# Altium PCB 51版_2020-06-08_13-23-04.pcbdoc
Units mil, origin at the board's own origin, x right, y up, seen from the top; angles counter-clockwise.
Board outline 2349.92 x 2340 mil, 2 copper layers (Top Layer, Bottom Layer); 17 components, 44 nets, 98 pads, 27 vias.
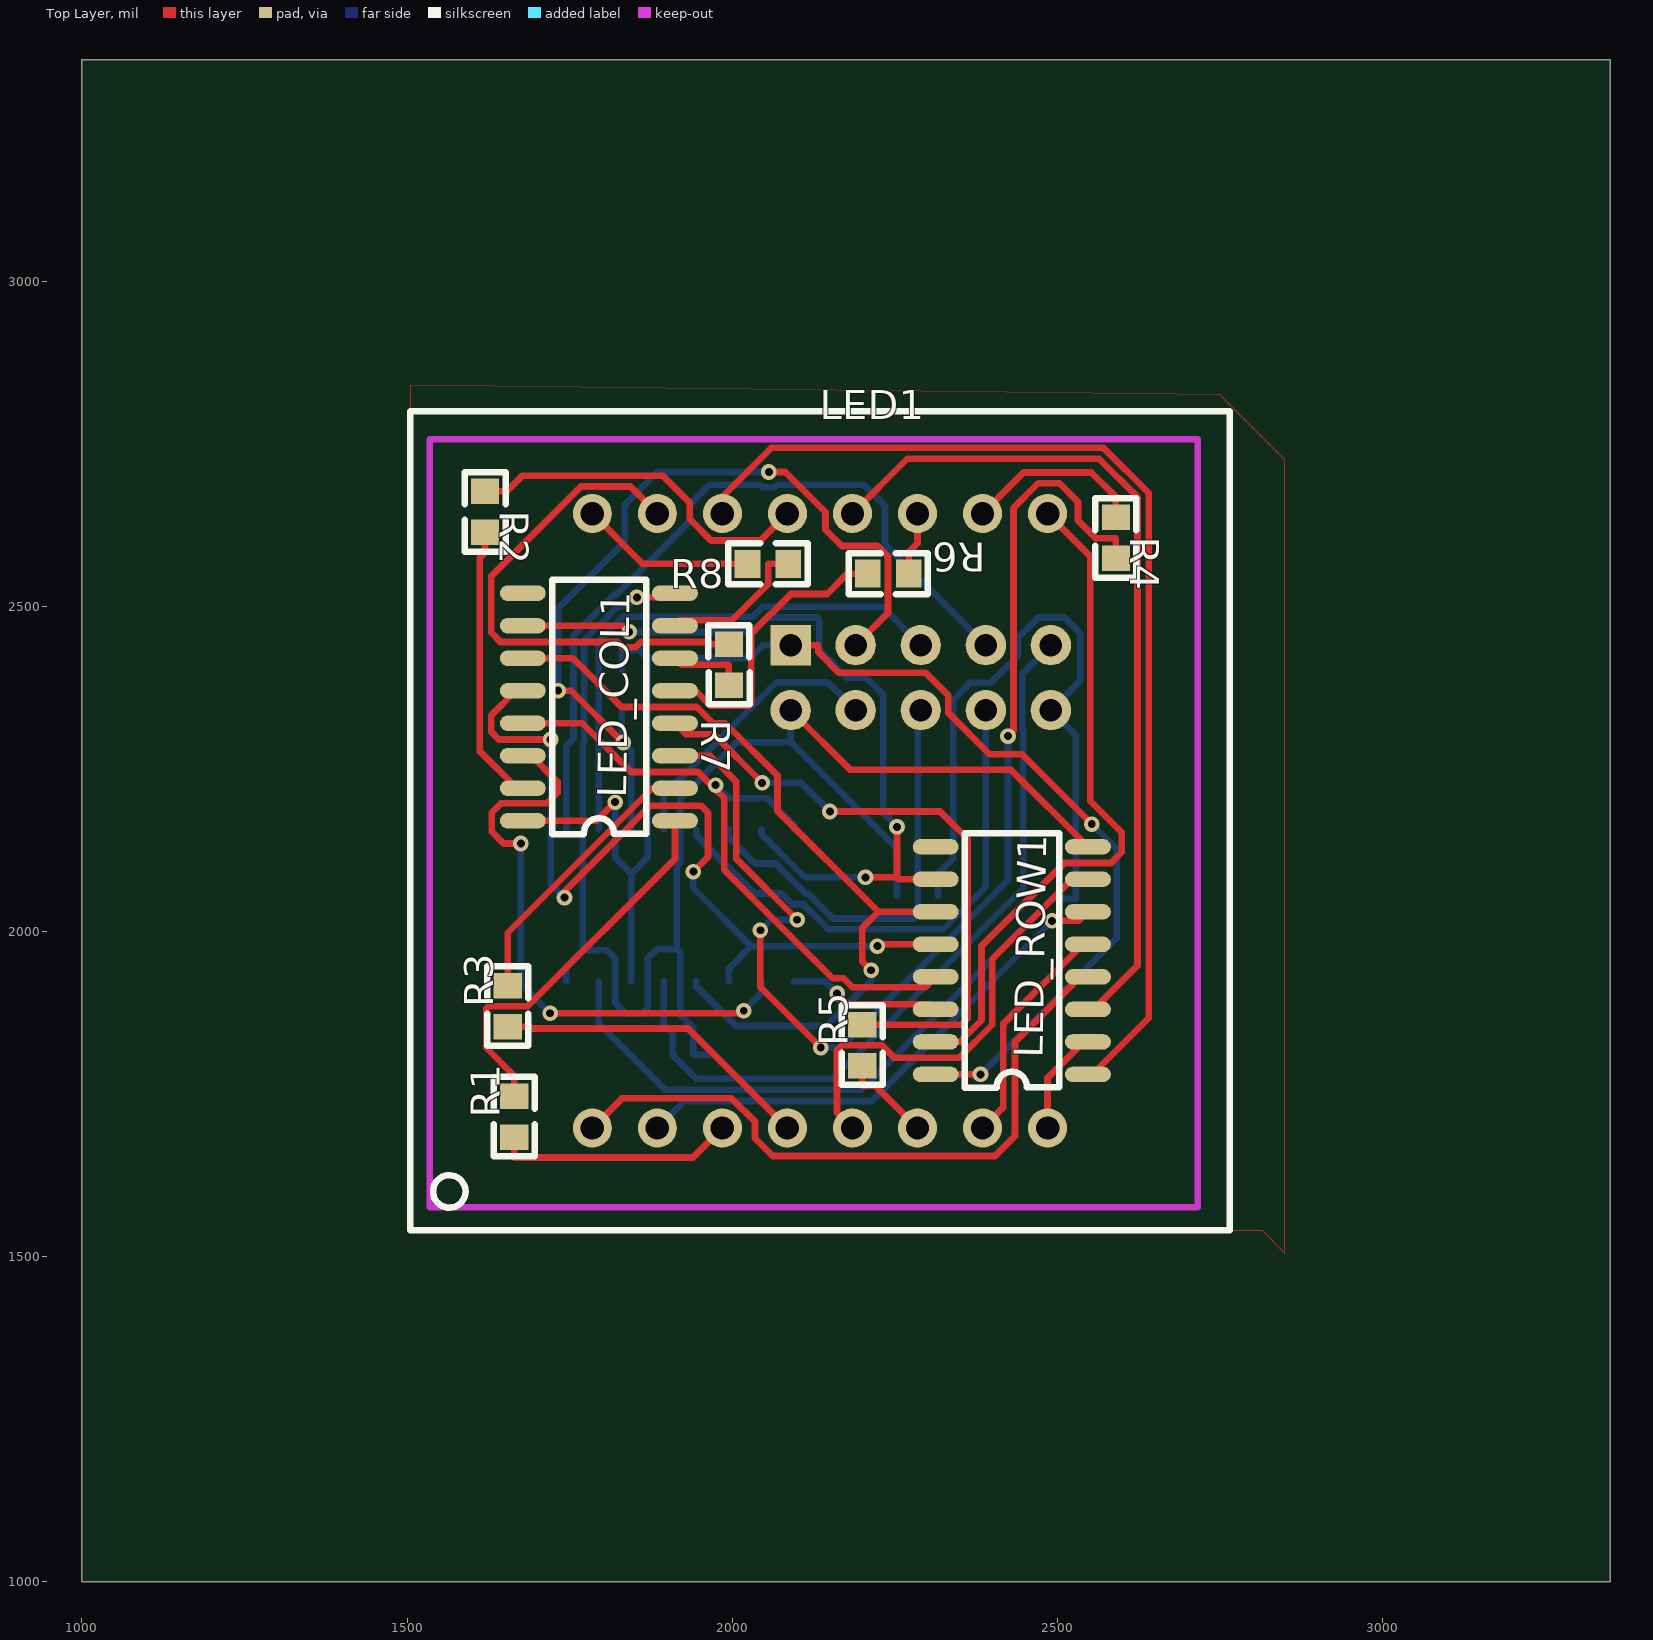
[diagram p0: Top Layer view]
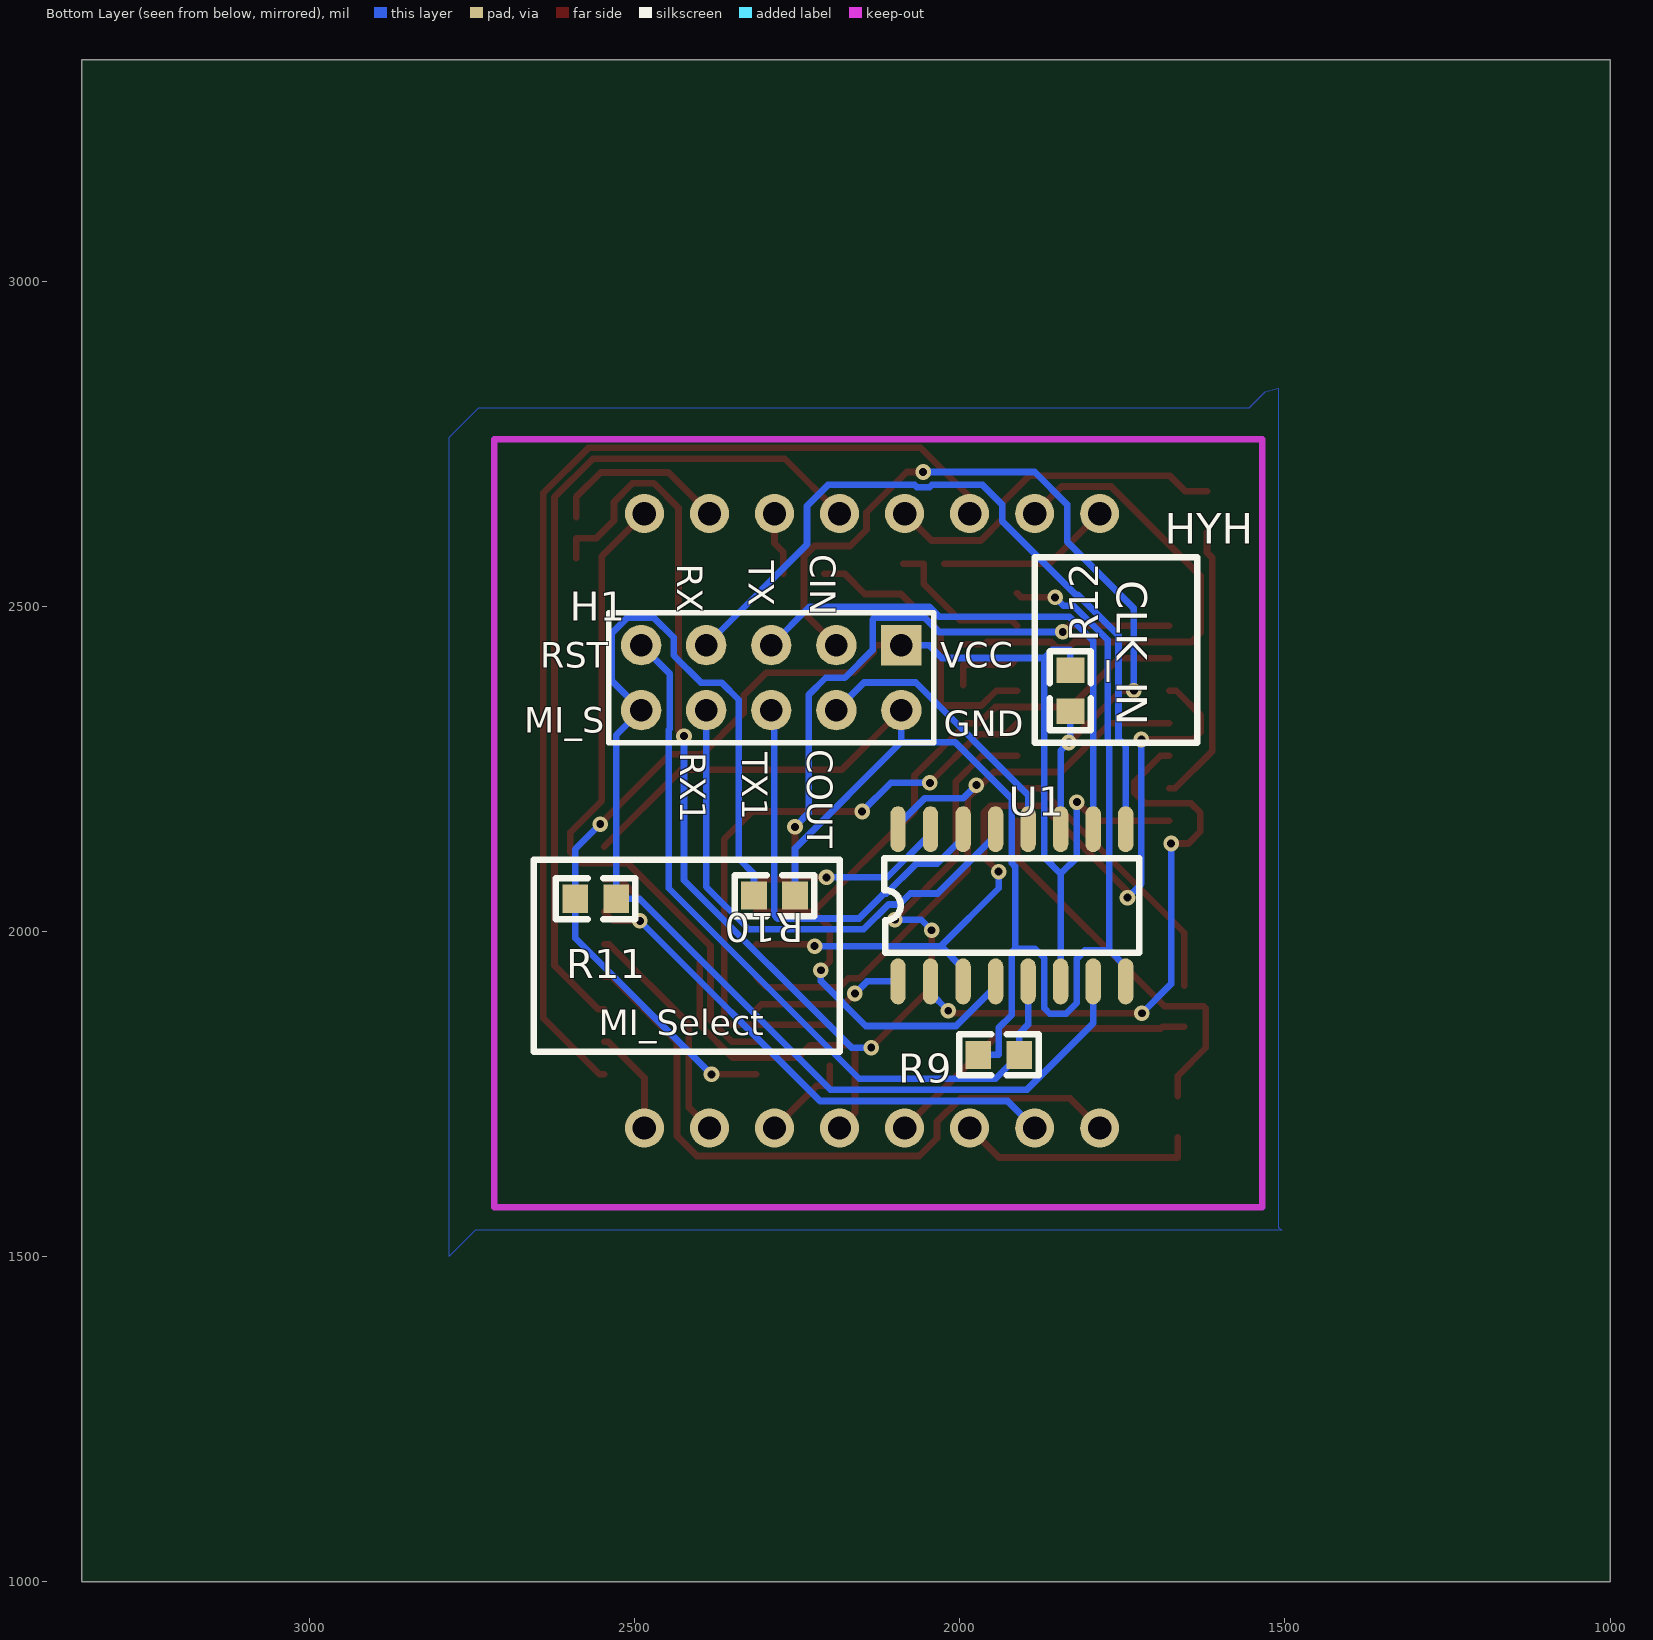
[diagram p1: Bottom Layer view, seen from below]

## Layer stack, top to bottom
Top Layer: signal copper (thickness not stored)
Dielectric: dielectric 12.6, FR-4, Dk 4.8
Bottom Layer: signal copper (thickness not stored)

## Board outline
3349.92,1000 1000,1000 1000,3340 3349.92,3340

## Components (designator, comment, footprint, x,y, rotation, side; value= is the part's Value field where it differs from the comment)
H1 "Female header2.54mm2*5p Straight" HDR-TH_10P-P2.54-V-R2-C5-S2.54 2289.92,2390 r180 bottom
LED1 "SLD1388DRA1GD" SLD1388DRA1GD 2134.92,2170 r0 top
LED_COL1 "74HC595D_C431479" SOIC-16_L9.9-W3.9-P1.27-LS6.0-BL#1 1794.92,2345 r90 top
LED_ROW1 "74HC595D_C431479" SOIC-16_L9.9-W3.9-P1.27-LS6.0-BL#1 2429.92,1955 r90 top
R1 "1K" R0603#1 1664.92,1715 r90 top
R2 "1K" R0603#1 1619.92,2645 r270 top
R3 "1K" R0603#1 1654.92,1885 r90 top
R4 "1K" R0603#1 2589.92,2605 r270 top
R5 "1K" R0603#1 2199.92,1825 r90 top
R6 "1K" R0603#1 2239.92,2550 r180 top
R7 "1K" R0603#1 1994.92,2410 r270 top
R8 "1K" R0603#1 2054.92,2565 r0 top
R9 "1K" R0603#2 1939.92,1810 r0 bottom
R10 "1K" R0603#2 2284.92,2055 r180 bottom
R11 "1K" R0603#2 2559.92,2050 r0 bottom
R12 "1K" R0603#2 1829.92,2370 r270 bottom
U1 "STC15W204S" SOIC-16_L9.9-W3.9-P1.27-LS6.0-BL#2 1919.92,2040 r0 bottom

## Footprints (in the part's own frame and the unit in brackets; to place one, negate y for a bottom-side part, rotate by r counter-clockwise, add the part's x,y. Pads: shape width x height; smd on the part's side, far side on the other; paste and mask are expansions set on the pad)
HDR-TH_10P-P2.54-V-R2-C5-S2.54 [mil]
  rect 62x62 hole 35: 1(200,50)
  round 62 hole 35: 2(200,-50) 3(100,50) 4(100,-50) 5(0,50) 6(0,-50) 7(-100,50) 8(-100,-50) 9(-200,50) 10(-200,-50)
  silkscreen extent -250,-100 250,100
R0603#1 [mm]
  rect 1x1.1 smd: 1(-0.8,0) 2(0.8,0)
  silkscreen extent -1.55,-0.8 1.55,0.81
R0603#2 [mm]
  rect 1x1.1 smd: 1(0.8,0) 2(-0.8,0)
  silkscreen extent -1.55,-0.81 1.55,0.8
SLD1388DRA1GD [mil]
  round 60 hole 36: 1(-350,-472.44) 2(-250,-472.44) 3(-150,-472.44) 4(-50,-472.44) 5(50,-472.44) 6(150,-472.44) 7(250,-472.44) 8(350,-472.44) 9(350,472.44) 10(250,472.44) 11(150,472.44) 12(50,472.44) 13(-50,472.44) 14(-150,472.44) 15(-250,472.44) 16(-350,472.44)
  silkscreen extent -630,-630 630,630
SOIC-16_L9.9-W3.9-P1.27-LS6.0-BL#1 [mil]
  oval 23.62x70.79 smd: 1(-175,-117) 2(-125,-117) 3(-75,-117) 4(-25,-117) 5(25,-117) 6(75,-117) 7(125,-117) 8(175,-117) 9(175,117) 10(125,117) 11(75,117) 12(25,117) 13(-25,117) 14(-75,117) 15(-125,117) 16(-175,117)
  silkscreen extent -196,-73 196,72
SOIC-16_L9.9-W3.9-P1.27-LS6.0-BL#2 [mil]
  oval 23.62x70.79 smd: 1(175,117) 2(125,117) 3(75,117) 4(25,117) 5(-25,117) 6(-75,117) 7(-125,117) 8(-175,117) 9(-175,-117) 10(-125,-117) 11(-75,-117) 12(-25,-117) 13(25,-117) 14(75,-117) 15(125,-117) 16(175,-117)
  silkscreen extent -196,-72 196,73

## Via types
v1: diameter 24.02, hole 12.2, Top Layer to Bottom Layer, 27 vias

## Nets (pads, with @x,y where several pads share a name; then routed paths per layer and width w, separated by ;. In a path a pad name is that pad's centre, name@x,y a point inside that pad or via, vN(x,y) a via of type N, cw(c..) or ccw(c..) an arc to the next point about the centre after c; other vN are vias at no path point)
CLK_IN: H1.3 R12.1 U1.11 | length 1301.5
  Top Layer w10.24: v1(1732.32,2370) 1752.52,2370 v1(1832.22,2290.4) ; v1(2056.32,2706.3) 2081.62,2706.3 2143.42,2644.5 2143.42,2617.6 2168.42,2592.6 2223.42,2592.6 2239.62,2576.4 2239.62,2489.7 H1.3
  Bottom Layer w10.24: v1(1732.32,2370) 1732.32,2496.6 1834.92,2599.2 1834.92,2656.6 1884.72,2706.3 v1(2056.32,2706.3) ; R12.1 1829.92,2307.3 1829.92,2292.6 v1(1832.22,2290.4) 1844.92,2277.6 U1.11
CLK_OUT: H1.4 U1.12 | length 437.2
  Bottom Layer w10.24: U1.12 1894.92,2209.9 2067.62,2382.7 2147.22,2382.7 H1.4
COL_IN: LED_COL1.14 U1.2 | length 917.8
  Top Layer w10.24: v1(1674.92,2135) 1648.42,2135 1630.12,2153.3 1630.12,2182.6 1644.22,2196.7 1714.92,2196.7 1731.42,2213.2 1731.42,2229.8 1691.22,2270 LED_COL1.14 ; v1(1719.92,1874) 2013.82,1874 v1(2017.72,1877.9)
  Bottom Layer w10.24: v1(1674.92,2135) 1674.92,1919.1 v1(1719.92,1874) ; v1(2017.72,1877.9) 2044.92,1905.1 U1.2
COL_OUT: LED_COL1.9
G#(OE): LED_COL1.13 LED_ROW1.13 U1.16 | length 1031.5
  Top Layer w10.24: LED_COL1.13 1769.32,2320 1844.32,2245 1947.52,2245 v1@1971.12,2221.4 ; v1(1974.52,2224.8) v1@1971.12,2221.4 ; LED_ROW1.13 2297.02,1914.1 2184.92,1914.1 2171.12,1927.9 2154.42,1927.9 1987.82,2094.5 1987.82,2204.8 v1@1971.12,2221.4
  Bottom Layer w10.24: v1(1974.52,2224.8) 1994.42,2204.9 2053.62,2204.9 2094.92,2163.6 U1.16
GND: H1.2 LED_COL1.8 LED_ROW1.8 R9.1 R10.1 U1.8 | length 2557.6
  Top Layer w10.24: v1(1853.42,2513.6) 1905.52,2513.6 LED_COL1.8 ; H1.2 2181.62,2248.3 2428.62,2248.3 LED_ROW1.8
  Bottom Layer w10.24: U1.8 1744.92,1945.9 1769.92,1970.9 ; v1(1853.42,2513.6) 1840.42,2500.6 1825.02,2500.6 1772.42,2448 1772.42,2289.3 1769.92,2286.7 1769.92,1970.9 ; R9.1 1940.22,1810 1940.22,1851.3 1919.92,1871.7 1919.92,1968 1914.92,1972.9 ; H1.2 2089.92,2291 ; R10.1 2253.42,2127.5 2089.92,2291 ; 1769.92,1970.9 1807.42,1970.9 1819.92,1958.4 1819.92,1890.1 1836.72,1873.3 1861.62,1873.3 1869.92,1881.7 1869.92,1958.6 1884.22,1972.9 1914.92,1972.9 ; 1914.92,1972.9 1914.92,2099.7 1919.92,2104.7 1919.92,2203.4 2007.42,2291 2089.92,2291
LED_COL0: LED_COL1.15 R2.2 | length 429.7
  Top Layer w10.24: R2.2 1619.92,2582.3 1611.62,2574 1611.62,2277.2 1668.82,2220 LED_COL1.15
LED_COL1: LED_COL1.1 R1.2 | length 597.2
  Top Layer w10.24: R1.2 1664.92,1777.7 1621.72,1820.9 1621.72,1881.7 1624.72,1884.7 1685.42,1884.7 1911.92,2111.2 LED_COL1.1
LED_COL2: LED_COL1.2 R3.2 | length 430.3
  Top Layer w10.24: R3.2 1654.92,1997.8 1877.12,2220 LED_COL1.2
LED_COL3: LED_COL1.3 R4.2 | length 1871
  Top Layer w10.24: LED_COL1.3 1966.22,2270 2006.32,2229.8 2006.32,2111.3 v1(2099.92,2017.8) ; v1(2043.22,2001.7) 2043.22,1914 v1(2136.12,1821.1) ; v1(2424.02,2300.1) 2432.42,2308.5 2432.42,2651 2470.42,2689 2503.22,2689 2531.82,2660.3 2531.82,2631.6 2558.72,2604.7 2589.92,2604.7 R4.2
  Bottom Layer w10.24: v1(2043.22,2001.7) 2059.32,2017.8 v1(2099.92,2017.8) ; v1(2136.12,1821.1) 2166.52,1821.1 2424.02,2078.6 v1(2424.02,2300.1)
LED_COL4: LED_COL1.4 R5.2 | length 966.1
  Top Layer w10.24: LED_COL1.4 1928.62,2303.3 1971.22,2303.3 v1(2046.12,2228.4) ; v1(2150.12,2184.2) 2319.72,2184.2 2362.12,2141.8 2362.12,1865.7 2352.92,1856.5 R5.2
  Bottom Layer w10.24: v1(2046.12,2228.4) 2105.92,2228.4 v1(2150.12,2184.2)
LED_COL5: LED_COL1.5 R6.2 | length 452.8
  Top Layer w10.24: LED_COL1.5 1944.02,2370 1966.72,2347.3 2026.02,2347.3 2029.02,2350.3 2029.02,2457.8 2090.12,2518.8 2146.02,2518.8 2177.22,2550 R6.2
LED_COL6: LED_COL1.6 R7.2 | length 118.5
  Top Layer w10.24: LED_COL1.6 1922.22,2409.7 1994.92,2409.7 R7.2
LED_COL7: LED_COL1.7 R8.2 | length 232.1
  Top Layer w10.24: LED_COL1.7 1920.22,2478.3 1999.72,2478.3 2055.22,2533.8 2055.22,2565 R8.2
LED_ROW0: LED1.9 LED_ROW1.15 | length 1041.9
  Top Layer w10.24: LED_ROW1.15 2349.92,1830 2383.22,1863.2 2383.22,1977.4 2510.82,2105 2582.52,2105 2599.02,2121.5 2599.02,2152 2550.42,2200.7 2550.42,2577 LED1.9
LED_ROW1: LED1.14 LED_ROW1.1 | length 1677.8
  Top Layer w10.24: LED1.14 1984.92,2668.2 2060.12,2743.4 2570.92,2743.4 2640.42,2674 2640.42,1866.8 2553.52,1780 LED_ROW1.1
LED_ROW2: LED1.8 LED_ROW1.2 | length 161.9
  Top Layer w10.24: LED1.8 2484.92,1774.6 2540.32,1830 LED_ROW1.2
LED_ROW3: LED1.12 LED_ROW1.3 | length 1322
  Top Layer w10.24: LED1.12 2269.22,2726.7 2564.02,2726.7 2623.12,2667.7 2623.12,1947.3 2555.72,1880 LED_ROW1.3
LED_ROW4: LED1.1 LED_ROW1.4 | length 1031.6
  Top Layer w10.24: LED1.1 1830.42,1743.1 1999.12,1743.1 2034.92,1707.3 2034.92,1681.7 2062.22,1654.4 2404.22,1654.4 2434.92,1685.1 2434.92,1829.9 2535.02,1930 LED_ROW1.4
LED_ROW5: LED1.7 LED_ROW1.5 | length 354.2
  Top Layer w10.24: LED1.7 2416.52,1729.1 2416.52,1857.5 2538.92,1980 LED_ROW1.5
LED_ROW6: LED1.2 LED_ROW1.6 | length 799.7
  Top Layer w10.24: v1(2492.02,2016.2) 2533.12,2016.2 LED_ROW1.6
  Bottom Layer w10.24: LED1.2 1926.42,1739.1 2214.82,1739.1 v1(2492.02,2016.2)
LED_ROW7: LED1.5 LED_ROW1.7 | length 699
  Top Layer w10.24: LED1.5 2161.12,1721.4 2161.12,1816.7 2169.02,1824.7 2230.12,1824.7 2249.42,1805.4 2348.92,1805.4 2399.82,1856.3 2399.82,1957.3 2522.52,2080 LED_ROW1.7
MI_SELECT: H1.10 R10.2 R11.2 U1.7 | length 1989.3
  Bottom Layer w10.24: U1.7 1794.92,1858.4 1896.72,1756.6 2199.12,1756.6 2492.52,2050 2497.22,2050 R11.2 2528.42,2301.5 H1.10 2534.92,2384.9 2534.92,2458.6 2510.72,2482.7 2470.82,2482.7 2439.92,2451.8 2439.92,2424.4 2398.02,2382.5 2366.32,2382.5 2339.92,2356.2 2339.92,2111.7 2316.42,2088.2 R10.2
R1_1: LED1.3 R1.1 | length 370
  Top Layer w10.24: R1.1 1664.92,1652.3 1939.72,1652.3 LED1.3
R2_1: LED1.13 R2.1 | length 548.3
  Top Layer w10.24: R2.1 1653.12,2676.5 1677.32,2700.7 1893.02,2700.7 1934.92,2658.8 1934.92,2633.6 1967.62,2600.9 2043.42,2600.9 LED1.13
R3_1: LED1.4 R3.1 | length 494.6
  Top Layer w10.24: R3.1 1688.12,1853.5 1691.12,1850.5 1932.02,1850.5 LED1.4
R4_1: LED1.10 R4.1 | length 278.1
  Top Layer w10.24: LED1.10 2448.12,2705.6 2552.02,2705.6 2589.92,2667.7 R4.1
R5_1: LED1.6 R5.1 | length 143
  Top Layer w10.24: R5.1 2199.92,1762.3 2220.22,1762.3 LED1.6
R6_1: LED1.11 R6.1 | length 98
  Top Layer w10.24: R6.1 2271.42,2583.2 2284.92,2596.7 LED1.11
R7_1: LED1.15 R7.1 | length 796.1
  Top Layer w10.24: LED1.15 1843.32,2684 1767.32,2684 1629.62,2546.3 1629.62,2459.1 1643.72,2445 1823.82,2445 1831.92,2436.9 1851.42,2436.9 1859.52,2445 1958.22,2445 1961.72,2441.5 R7.1
R8_1: LED1.16 R8.1 | length 270.6
  Top Layer w10.24: LED1.16 1862.32,2565 R8.1
RCK: LED_COL1.12 LED_ROW1.12 U1.3 | length 1332.4
  Top Layer w10.24: LED_COL1.12 1667.12,2370 1629.62,2332.5 1629.62,2306.4 1641.02,2295 v1(1720.82,2295) ; v1(1742.12,2051.7) 1742.12,2061.5 1873.92,2193.3 1951.92,2193.3 1962.82,2182.5 1962.82,2114.4 v1(1940.12,2091.7) ; v1(2223.22,1977.2) 2225.92,1980 LED_ROW1.12
  Bottom Layer w10.24: v1(1720.82,2295) 1720.82,2073 v1(1742.12,2051.7) ; v1(1940.12,2091.7) 1940.12,2066.2 2029.02,1977.2 ; U1.3 1994.92,1943.1 2029.02,1977.2 ; v1(2223.22,1977.2) 2029.02,1977.2
ROW_IN: LED_ROW1.14 U1.1 | length 235.8
  Top Layer w10.24: v1(2161.32,1904.4) 2178.02,1887.7 2305.22,1887.7 LED_ROW1.14
  Bottom Layer w10.24: U1.1 2142.72,1923 v1(2161.32,1904.4)
ROW_OUT: LED_ROW1.9
RST: H1.9 R9.2 U1.5 | length 1186.9
  Bottom Layer w10.24: U1.5 1894.92,1856.7 1908.42,1843.2 R9.2 1945.12,1773.3 2154.52,1773.3 2447.52,2066.3 2447.52,2309.8 2445.82,2311.5 2445.82,2395.9 H1.9
RX: H1.7 U1.9 | length 1187.3
  Bottom Layer w10.24: U1.9 1744.92,2285.3 1755.82,2296.2 1755.82,2454.9 1818.12,2517.2 1821.22,2517.2 1934.92,2630.9 1934.92,2656.6 1964.92,2686.5 2042.82,2686.5 2046.52,2682.8 2066.02,2682.8 2069.72,2686.5 2202.52,2686.5 2234.92,2654.1 2234.92,2595 H1.7
RX1: H1.8 U1.13 | length 813
  Bottom Layer w10.24: U1.13 1944.92,2147.2 2034.02,2058.1 2076.12,2058.1 2093.02,2041.3 2109.62,2041.3 2147.92,2003.1 2324.52,2003.1 2389.92,2068.4 H1.8
S$101: 
S$103: 
SCK: LED_COL1.11 LED_ROW1.11 U1.4 | length 1281.5
  Top Layer w10.24: LED_COL1.11 1755.02,2420 1829.92,2345 1945.42,2345 1970.52,2319.9 1989.32,2319.9 2069.62,2239.6 2069.62,2185.2 2224.82,2030 ; v1(2213.62,1940.1) 2199.72,1954 2199.72,2004.9 2224.82,2030 ; LED_ROW1.11 2224.82,2030
  Bottom Layer w10.24: U1.4 1944.92,1915.2 2005.72,1854.4 2144.62,1854.4 2213.62,1923.4 v1(2213.62,1940.1)
SCLR: LED_COL1.10 LED_ROW1.10 U1.15 | length 1237.7
  Top Layer w10.24: LED_COL1.10 1832.12,2470 v1(1841.62,2460.4) ; v1(2204.92,2083.1) 2253.42,2083.1 ; v1(2253.42,2160.7) 2253.42,2083.1 ; LED_ROW1.10 2256.62,2080 2253.42,2083.1
  Bottom Layer w10.24: v1(1841.62,2460.4) 2032.02,2460.4 2054.12,2482.5 2130.92,2482.5 2134.02,2479.3 2134.02,2432.7 2176.72,2390 2206.12,2390 2232.42,2363.6 2232.42,2181.7 v1(2253.42,2160.7) ; U1.15 2044.92,2149.6 2111.42,2083.1 v1(2204.92,2083.1)
TX: H1.5 U1.10 | length 831.2
  Bottom Layer w10.24: U1.10 1794.92,2446.9 1831.92,2483.9 2032.02,2483.9 2047.42,2499.3 2230.62,2499.3 H1.5
TX1: H1.6 U1.14 | length 674
  Bottom Layer w10.24: U1.14 1994.92,2144 2034.62,2104.2 2066.72,2104.2 2113.02,2057.9 2116.52,2057.9 2154.82,2019.7 2280.12,2019.7 2285.22,2024.8 2285.22,2335.3 H1.6
VCC: H1.1 LED_COL1.16 LED_ROW1.16 R11.1 R12.2 U1.6 | length 2241.9
  Top Layer w10.24: LED_COL1.16 1791.32,2170 v1(1819.92,2198.6) ; H1.1 2132.42,2440 2132.42,2429.4 2164.32,2397.5 2297.82,2397.5 2332.42,2362.9 2332.42,2335.8 2395.82,2272.4 2445.42,2272.4 v1(2552.82,2164.9) ; LED_ROW1.16 v1(2381.72,1780)
  Bottom Layer w10.24: v1(1819.92,2198.6) 1819.92,2113.6 1844.92,2088.6 ; R12.2 1829.92,2432.7 1857.62,2432.7 1869.92,2420.3 ; U1.6 1844.92,2088.6 ; H1.1 2047.42,2440 2027.72,2420.3 1869.92,2420.3 ; v1(2381.72,1780) 2591.42,1989.7 R11.1 2591.42,2126.4 v1(2552.82,2164.9) ; 1844.92,2088.6 1869.92,2113.6 1869.92,2420.3

## Polygon pours and split planes (outlines as drawn)
GND on Top Layer (solid): 1504.92,2840 1504.92,1550 1514.92,1540 2814.92,1540 2849.92,1505 2849.92,2725 2749.92,2825
GND on Bottom Layer (solid): 1509.92,2835 1509.92,1545 1504.92,1540 2744.92,1540 2784.92,1500 2784.92,2760 2739.92,2805 1554.92,2805 1529.92,2830

## Silkscreen, mask and mechanical layers (free items; w line width, h text height)
Bottom Overlay:
  lines w10: 1634.92,2290 1884.92,2290 1884.92,2575 1634.92,2575 1634.92,2290 ; 2184.92,1815 2654.92,1815 2654.92,2110 2184.92,2110 2184.92,1815
  text "HYH" at 1684.92,2596.38 h47.24
  text "CIN" at 2229.6,2580 h39.37 r90
  text "TX" at 2324.6,2570 h39.37 r90
  text "RX" at 2434.6,2565 h39.37 r90
  text "CLK_IN" at 1758.54,2540 h47.24 r90
  text "VCC" at 2029.92,2405.32 h39.37
  text "RST" at 2644.92,2405.32 h39.37
  text "MI_S" at 2669.92,2305.32 h39.37
  text "GND" at 2024.92,2300.32 h39.37
  text "COUT" at 2234.6,2280 h39.37 r90
  text "TX1" at 2334.6,2275 h39.37 r90
  text "RX1" at 2429.6,2275 h39.37 r90
  text "MI_Select" at 2554.92,1840.32 h39.37
Document:
  lines w0.1: 2173.96,2169 2175.96,2171